# EAGLE board sous-vide_connect (EAGLE 6.6.0)

Size 81.28 x 81.28 mm. Coordinates in mm from the lower left corner, seen from the top.
Outline: 0,76.04 0,5.08 arc90 5.08,0 76.2,0 arc90 81.28,5.08 81.28,76.2 arc90 76.2,81.28 5.24,81.28 arc90 0,76.04
Copper layers (1*16): Top 0.035mm / dielectric 1.5mm / Bottom 0.035mm
Design rules "default": minimum track width 10mil, minimum drill 24mil, track to track 8mil, track to pad 8mil, pad to pad 8mil, via to via 8mil, smd to smd 8mil, copper to edge 40mil, drill to drill 8mil, minimum pad ring 10mil, minimum via ring 8mil, stop-mask expansion 4mil, vias tented up to drill 0mil, thermal gap 10mil

## Footprints (pad centres in the part's own frame; a part is rotated, then mirrored left to right if it is on the bottom)
2KBB-R = drill 1.016 long: + -7.62,0; - 7.391,0; AC1 -2.616,0; AC2 2.413,0
E5-10,5 = drill 1.016 pad 2.54: + -2.54,0 | drill 1.016 pad 2.54 octagon: - 2.54,0
DO35-7 = drill 0.813 long: A 3.81,0; C -3.81,0
3,0 = hole 3: 0,0
TO220V = drill 1.016 long: 1 -2.54,-2.54; 2 0,-2.54; 3 2.54,-2.54
1X03 = drill 1.016 long: 1 -2.54,0; 2 0,0; 3 2.54,0
APF30212C = drill 1 pad 1.7: 1 -12.6,0; 2 -8.82,0 | drill 1.3 pad 1.9: COM 7.56,0; NC 2.52,0; NO 12.6,0
LED3MM = drill 0.813 octagon: A -1.27,0; K 1.27,0
0207/10 = drill 0.813 octagon: 1 -5.08,0; 2 5.08,0
ML6 = drill 0.914 octagon: 1 -2.54,-1.27; 2 -2.54,1.27; 3 0,-1.27; 4 0,1.27; 5 2.54,-1.27; 6 2.54,1.27
EI38-1 = drill 1.118 pad 3.81 octagon: 1 -12.497,10.008; 5 -12.497,-10.008; 6 12.497,-10.008; 7 12.497,-5.004; 9 12.497,5.004; 10 12.497,10.008

## Placement (x,y rotation side)
B1  [2KBB-R]  33.02,63.5 90 top
C1  [E5-10,5]  21.59,52.07 270 top
C2  [E5-10,5]  44.45,76.2 90 top
C3  [E5-10,5]  21.59,74.93 90 top
C4  [E5-10,5]  43.18,50.8 270 top
D1  1N4148DO35-7  [DO35-7]  83.82,33.02 270 top
D2  1N4148DO35-7  [DO35-7]  68.58,33.02 270 top
D3  1N4148DO35-7  [DO35-7]  54.61,33.02 270 top
H1  MOUNT-HOLE3.0  [3,0]  5.08,44.45 0 top
H2  MOUNT-HOLE3.0  [3,0]  76.2,49.53 0 top
H3  MOUNT-HOLE3.0  [3,0]  76.2,5.08 0 top
H4  MOUNT-HOLE3.0  [3,0]  5.08,5.08 0 top
IC1  7805TV  [TO220V]  41.91,64.77 90 top
IC2  7805TV  [TO220V]  19.05,63.5 90 top
JP1  [1X03]  8.89,69.85 270 top
K1  APF30212C  [APF30212C]  78.74,24.13 270 top
K2  APF30212C  [APF30212C]  63.5,24.13 270 top
K3  APF30212C  [APF30212C]  49.53,24.13 270 top
LED1  [LED3MM]  77.47,40.64 180 top
LED2  [LED3MM]  62.23,40.64 180 top
LED3  [LED3MM]  48.26,40.64 180 top
R1  [0207/10]  72.39,31.75 270 top
R2  [0207/10]  58.42,31.75 270 top
R3  [0207/10]  43.18,33.02 270 top
SV1  [ML6]  10.16,55.88 90 bottom
TR1  [EI38-1]  22.86,26.67 90 top

## Library data of the parts
B1 = rectifier
C1-C4 = rcl
D1-D3 = diode
H1-H4 = holes
IC1 IC2 = linear
JP1 = pinhead
K1-K3 = relay; OC_FARNELL: unknown
LED1-LED3 = led
R1-R3 = resistor
SV1 = con-ml; OC_FARNELL: unknown; OC_NEWARK: unknown
TR1 = trafo

## Nets
GND: B1.- C1.- C2.- C3.- C4.- D1.A D2.A D3.A IC1.2 IC2.2 JP1.3 K1.2 K2.2 K3.2 R1.2 R2.2 R3.2 SV1.6
N$1: B1.AC1 TR1.9
N$2: B1.AC2 TR1.7
N$3: D1.C K1.1 LED1.A SV1.1
N$4: B1.+ C1.+ C4.+ IC1.1 IC2.1
N$5: JP1.2 SV1.4
N$6: LED1.K R1.1
N$7: LED2.K R2.1
N$8: D2.C K2.1 LED2.A SV1.3
N$9: D3.C K3.1 LED3.A SV1.5
N$10: LED3.K R3.1
N$11: C2.+ IC1.3
VCC: C3.+ IC2.3 JP1.1 SV1.2

## Tracks (layer width: path | path; a pad name or v marks a point on that pad's centre or on a via)
GND  (17 unrouted)
N$1  (1 unrouted)
N$2  (1 unrouted)
N$3  (3 unrouted)
N$4  (4 unrouted)
N$5  (1 unrouted)
N$6  (1 unrouted)
N$7  (1 unrouted)
N$8  (3 unrouted)
N$9  (3 unrouted)
N$10  (1 unrouted)
N$11  (1 unrouted)
VCC  (3 unrouted)